# Altium PCB AP.PcbDoc (part 3 of 3)
Units mm, origin at the board's own origin, x right, y up, seen from the top; angles counter-clockwise.
Board outline 75.1 x 75.1 mm, 2 copper layers (Top Layer, Bottom Layer); 135 components, 138 nets, 746 pads, 286 vias.
Unrouted connection lines stored in the file: 9.
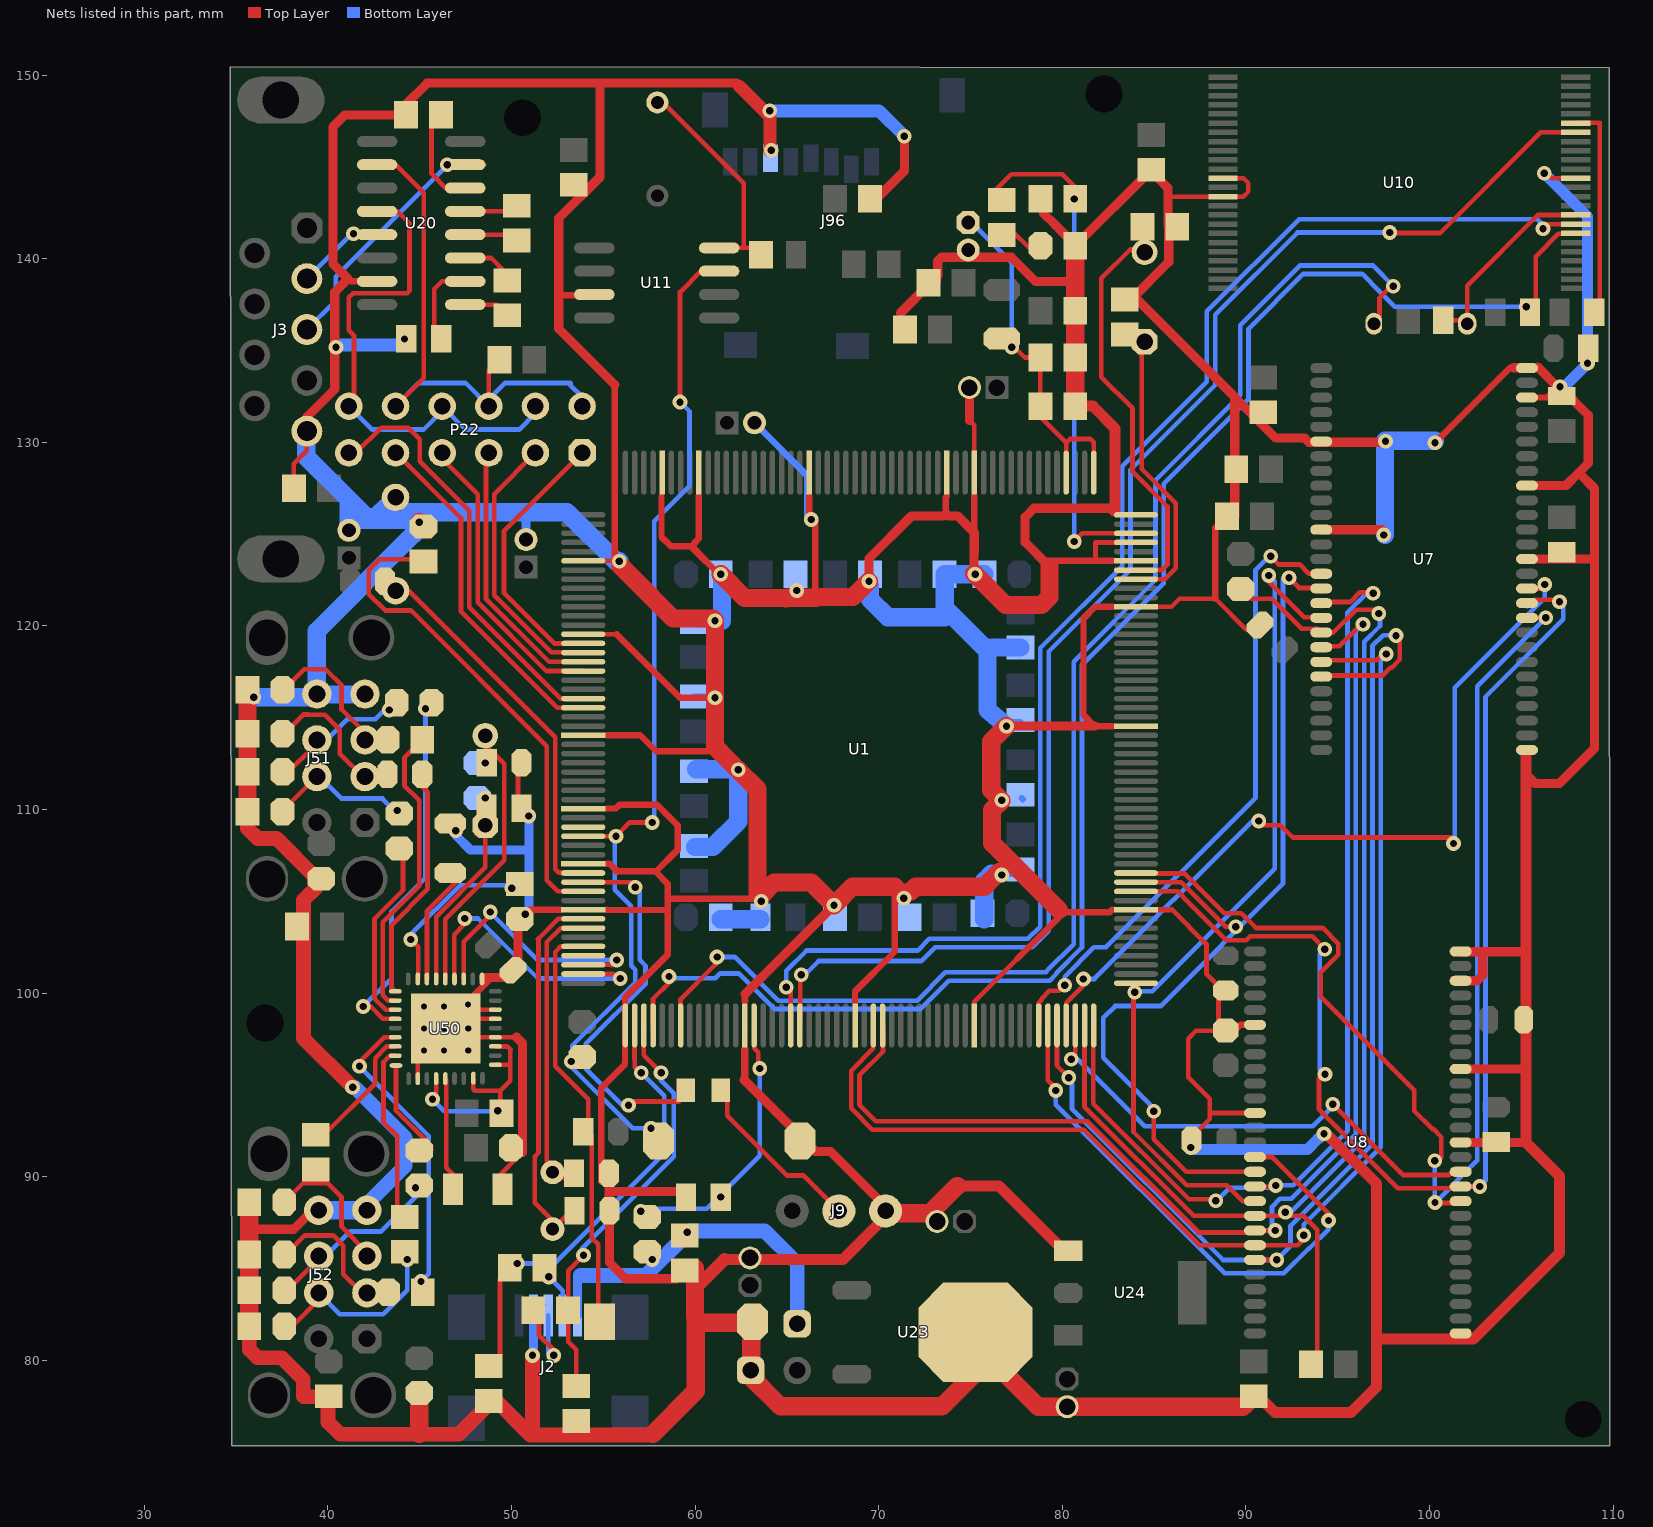
[diagram p3: the nets of this part, all layers, seen from the top]

## Via types
v1: diameter 0.8, hole 0.4, Top Layer to Bottom Layer, 277 vias
v2: diameter 0.66, hole 0.33, Top Layer to Bottom Layer, tented top, 9 vias

## Nets (pads, with @x,y where several pads share a name; then routed paths per layer and width w, separated by ;. In a path a pad name is that pad's centre, name@x,y a point inside that pad or via, vN(x,y) a via of type N, cw(c..) or ccw(c..) an arc to the next point about the centre after c; other vN are vias at no path point) (continued)
GND: C1.1 C2.1 C3.1 C4.1 C5.1 C6.1 C7.1 C8.1 C9.1 C10.1 C11.1 C12.1 C13.1 C14.1 C15.1 C16.1 C17.1 C18.1 C19.1 C20.1 C21.2 C22.2 C23.2 C24.2 C25.1 C26.2 C27.2 C28.2 C29.2 C33.2 C34.2 C35.2 C38.1 C39.2 C40.2 C41.2 C42.1 C45.2 C46.2 C47.2 C51.1 C52.1 C53.1 C54.1 C55.1 C56.1 C57.1 C58.1 C60.2 C61.2 C62.2 C63.2 C64.2 C66.2 C70.1 C80.2 C81.2 C82.2 C83.2 C88.2 C89.2 C90.2 C91.2 C92.2 C93.2 C98.2 C99.2 C120.2 C121.1 J2.4 J3.5 J7.2 J9.1 J51.4 J51.8 J52.4 J52.8 J96.6 P20.1 R13.2 R16.1 R88.2 R89.1 R90.2 R91.2 R92.2 R93.2 R94.1 R95.1 R100.2 S1.1 S2.2 U1.6 U1.14 U1.25 U1.33 U1.39 U1.44 U1.53 U1.66 U1.78 U1.91 U1.113 U1.133 U1.146 U1.151 U1.153 U1.156 U1.170 U1.173 U1.188 U1.200 U1.204 U7.6 U7.12 U7.28 U7.41 U7.46 U7.52 U7.54 U8.6 U8.12 U8.28 U8.41 U8.46 U8.52 U8.54 U10.13 U10.36 U10.38 U11.7 U20.15 U23.4 U24.1 U50.11 U50.22 U50.24 U50.25 U50.28 U50.33@46.425,98.075 | length 895.8
  Top Layer w0.2: U1.33@53.9,110.057 U1.33@53.911,110.046
  Top Layer w0.25: C70.1@38.166,127.508 38.15,127.524 38.15,128.825 38.86,129.535 J3.5@38.86,130.604 38.86,131.112 38.872,131.124 J3.5@38.872,131.397 ; U50.33@48.039,99.1 U50.25@49.125,99.1 ; U50.33@48.064,98.6 U50.24@49.125,98.6 ; U50.33@48.089,97.6 U50.22@49.125,97.6 ; C90.2@50.175,109.692 C90.2@50.392,109.909 ; U1.14@53.911,119.546 55.726,119.546 ; U1.6@53.911,123.546 55.663,123.546 v1@55.686,123.546 ; 74.942,131.191 75.211,130.922 U1.170@75.211,128.346 ; U1.91@75.211,98.246 75.211,99.538 77.573,101.9 ; 81.809,123.562 81.809,124.546 U1.153@84.011,124.546 ; C22.2@83.4,137.825 C22.2@83.798,137.825 ; U1.133@84.011,114.546 U1.133@84.017,114.552 ; U1.146@84.011,121.046 85.946,121.046 86.392,121.492 88.333,121.492 90,119.825 90.541,119.825 C66.2@90.768,120.052 ; C51.1@85.229,144.89 85.278,144.89 C51.1@85.278,144.322 ; 85.754,143.381 U10.38@88.753,143.381 U10.38@88.728,143.406 ; 85.98,104.546 85.991,104.546 ; C57.1@86.934,91.44 86.934,92.059 88.025,93.15 88.025,94.261 86.854,95.431 86.854,97.53 87.279,97.955 88.479,97.955 88.504,97.93 88.655,97.93 C58.1@88.675,97.95 ; 88.025,93.476 U8.12@90.496,93.476 ; C52.1@88.333,125.351 C52.1@88.966,125.984 ; U10.38@88.753,143.369 89.844,143.369 90.137,143.662 90.137,144.109 89.866,144.381 U10.36@88.753,144.381 ; v1@106.313,144.712 106.639,144.386 U10.13@107.953,144.386
  Top Layer w0.254: U50.11@44.9,95.35 U50.33@44.9,96.743 ; U50.33@46.425,98.075 U50.33@46.61,98.075 ; C98.2@49.1,89.825 C120.2@50.6,91.325 ; U50.22@49.125,97.6 50.275,97.6 ; C121.1@49.8,101.05 49.611,101.239 49.611,101.261 C121.1@50.088,101.261 ; C90.2@50.361,110.426 C89.2@50.361,112.458 ; 85.98,104.546 87.85,102.676 87.85,101.054 88.504,100.4 C58.1@88.504,97.93
  Top Layer w0.275: U1.113@84.011,104.546 85.979,104.546
  Top Layer w0.35: C83.2@38.432,103.632 C83.2@38.674,103.632 ; 41.275,138.768 U20.15@42.685,138.768 ; v1(44.175,135.625) 44.264,135.625 C38.1@44.275,135.636 ; U50.33@47.925,99.85 48.888,100.813 ; R100.2@50.067,104.008 R100.2@50.35,103.725 ; R100.2@50.442,104.037 50.953,104.548 52.65,104.548 ; C90.2@50.543,110.06 v1(50.95,109.653) ; 52.578,138.007 54.47,138.007 U11.7@54.512,138.049 ; C24.2@54.889,89.725 54.889,94.839 56.186,96.136 56.186,99.767 ; 55.203,104.546 55.216,104.533 58.503,104.533 ; 55.203,107.046 55.352,107.043 55.775,106.6 ; 55.213,114.046 57.011,114.046 57.888,113.169 61.341,113.169 ; 55.215,110.057 55.689,110.057 55.886,110.254 57.937,110.254 59.049,109.142 59.049,107.798 57.858,106.607 ; 55.626,133.139 v1@55.626,123.606 ; 55.726,119.546 59.182,116.09 v1(61.087,116.09) ; 55.75,106.688 55.788,106.65 57.815,106.65 57.858,106.607 ; v1(55.878,123.531) 55.701,123.531 v1@55.626,123.606 ; v1@55.953,123.279 55.686,123.546 v1@55.626,123.606 ; 56.186,99.453 56.186,99.767 ; 56.503,122.706 56.503,122.954 56.202,123.255 55.953,123.255 55.663,123.546 55.626,123.583 v1@55.626,123.606 ; 58.172,127.036 58.172,124.847 58.669,124.35 59.755,124.35 59.944,124.161 ; 59.997,82.393 59.997,83.897 ; 60.04,82.057 60.045,82.062 ; 60.192,125.964 60.192,124.742 59.944,124.494 59.944,124.226 ; 60.211,125.983 60.211,127.054 ; v1@61.343,122.762 v1@61.284,122.821 ; v1@61.342,122.763 v1@61.287,122.821 ; v1@61.343,122.762 61.443,122.662 61.344,122.765 v1@61.291,122.821 ; v1(61.402,122.821) v1@61.291,122.821 ; S1.1@62.653,81.881 S1.1@62.702,81.832 ; 62.711,99.563 62.738,99.59 ; 62.713,99.615 62.713,100.011 ; S1.1@62.989,81.545 S1.1@63.059,81.475 ; P20.1@63.059,79.799 63.21,79.599 P20.1@63.294,79.488 ; v1@63.375,105.092 v1@63.426,105.143 ; v1@63.479,105.196 v1@63.426,105.143 ; v1@63.6,105.143 v1@63.426,105.143 ; v1(65.532,121.932) 65.405,121.805 64.975,121.5 65.532,121.507 66.579,121.532 ; 66.211,127.054 66.211,126.079 66.22,126.07 66.548,125.742 66.548,121.551 ; 68.711,99.538 68.711,100.092 70.878,102.259 70.878,105.168 70.878,105.803 ; v1@69.469,122.313 v1(69.469,122.44) ; C40.2@69.53,143.256 C40.2@69.881,143.256 ; J9.1@70.25,88.142 J9.1@70.25,88.025 ; J9.1@70.25,88.266 J9.1@70.25,88.025 ; J9.1@70.491,88.025 J9.1@70.25,88.025 ; v1(71.374,105.168) 71.755,105.549 ; 71.374,105.803 70.878,105.803 ; 71.755,105.803 70.878,105.803 ; C27.2@72.767,138.626 73.218,139.077 C27.2@73.218,138.684 ; 73.66,126.117 73.66,127.003 73.711,127.054 ; 75.211,124.853 75.211,125.08 75.202,125.089 75.211,127.054 ; U23.4@75.654,83.709 76.516,83.709 76.527,83.698 76.53,83.696 U23.4@76.98,83.245 ; v1@76.554,106.592 v1@76.708,106.746 ; v1@76.683,110.502 76.683,110.477 v1(76.708,110.502) ; v1(76.708,106.438) v1@76.708,106.746 ; v1@76.862,106.592 v1@76.708,106.746 ; 77.573,101.9 79.817,104.144 79.817,104.533 79.931,104.419 82.573,104.419 82.687,104.533 ; 78.994,142.456 78.994,143.256 C28.2@78.994,143.775 ; 79.031,123.546 82.719,123.546 ; 79.609,141.841 79.611,141.841 ; U24.1@79.807,85.678 U24.1@79.807,85.966 ; 79.831,141.619 79.831,141.621 ; C29.2@80.6,140.85 80.706,140.85 C29.2@80.825,140.85 ; C29.2@80.765,140.657 C29.2@80.765,140.754 ; 82.522,126.405 82.804,126.123 ; 82.706,104.533 82.719,104.546 ; 82.719,114.546 81.768,114.546 81.153,115.161 81.153,120.408 81.791,121.046 82.719,121.046 ; C22.2@83.875,137.983 C22.2@83.875,137.995 ; C51.1@84.796,144.938 C51.1@84.836,144.956 ; C51.1@84.841,144.831 C51.1@85.202,144.956 ; C51.1@85.061,144.715 C51.1@85.202,144.956 ; C51.1@85.229,144.89 C51.1@85.202,144.956 ; 87.02,134.838 89.393,132.464 ; 88.333,121.492 C52.1@88.333,125.351 ; C58.1@89.24,97.81 89.706,98.276 U8.6@90.496,98.276 ; C52.1@89.393,125.933 C52.1@89.408,125.918 ; v1(100.3,129.975) 104.382,134.057 104.582,134.057 ; U8.52@101.252,100.676 U8.52@101.696,100.676 ; U8.54@101.431,102.276 U8.54@101.696,102.276 ; U8.28@101.696,81.476 U8.28@102.024,81.476 ; U7.46@105.302,127.642 U7.46@105.309,127.649 ; U7.52@105.302,132.442 106.417,132.442 v1@107.005,133.03 ; U7.54@105.474,134.1 U7.54@105.887,134.1 ; v1@106.957,133.03 v1@107.005,133.03 ; v1@107.053,133.078 v1@107.005,133.03 ; v1(107.101,133.03) v1@107.005,133.03 ; 56.186,99.767 58.503,102.084 58.503,104.533 ; 57.858,106.607 58.503,105.962 58.503,105.143 ; 58.503,104.533 58.503,105.143 ; 58.503,105.143 v1@63.426,105.143 ; 59.944,124.161 v1@61.284,122.821 ; 59.944,124.161 59.944,124.226 ; 59.944,124.226 v1@61.287,122.821 ; 59.944,124.226 59.825,124.35 59.944,124.226 ; 59.944,124.226 v1@61.291,122.821 ; v1@61.284,122.821 v1@61.287,122.821 ; v1@61.287,122.821 v1@61.291,122.821
  Top Layer w0.4: 62.7,95.3 62.7,96.925
  Top Layer w0.5: 35.996,87.15 38.15,87.15 39.18,88.18 J52.8@39.506,88.18 ; J3.5@38.872,131.397 40.375,132.9 40.375,138.175 41.1,138.9 40.275,139.725 40.275,147.175 40.928,147.828 C42.1@44.262,147.828 ; C42.1@44.262,148.414 45.409,149.561 62.239,149.561 62.414,149.386 ; U50.28@48.5,100.85 50.05,100.85 50.35,101.15 R100.2@50.35,103.725 ; 50.275,97.6 50.6,97.275 C120.2@50.6,91.85 ; C120.2@50.6,91.325 50.6,92.15 ; 54.825,149.386 54.825,144.45 52.578,142.203 52.578,138.007 52.578,136.187 55.626,133.139 ; C23.2@55.306,88.186 55.306,89.204 ; C24.2@55.306,90.191 55.306,89.204 ; C23.2@55.333,88.159 55.333,85.342 56.225,84.45 58.984,84.45 C33.2@59.436,84.902 ; R13.2@59.198,89.204 55.306,89.204 ; 62.675,95.275 66.562,91.388 67.362,91.388 J9.1@70.491,88.259 ; 62.738,99.961 v1(67.564,104.787) ; v1(69.469,122.44) 69.469,123.669 71.79,125.99 73.527,125.99 ; C40.2@69.881,143.256 71.4,144.775 v1(71.4,146.675) ; 71.186,137.045 C27.2@72.767,138.626 ; C27.2@73.218,139.077 73.218,139.875 73.418,140.075 77.225,140.075 78.55,138.75 80.706,138.75 ; 73.66,126.117 73.787,125.99 74.301,125.99 75.202,125.089 v1@75.191,122.821 ; 74.942,131.191 C39.2@74.942,132.981 ; v1(76.962,114.546) 81.768,114.546 ; 78.994,142.456 79.609,141.841 ; 79.3,123.225 77.975,124.55 77.975,125.925 78.455,126.405 82.522,126.405 ; 79.611,141.841 79.831,141.621 ; 79.831,141.619 C29.2@80.6,140.85 ; C29.2@80.765,140.754 C51.1@84.841,144.831 ; C22.2@83.798,137.825 85.8,139.827 C21.2@85.8,141.857 ; C22.2@83.875,137.983 87.02,134.838 91.626,130.231 92.502,130.231 93.207,130.231 93.432,130.006 97.556,130.006 v1(97.6,130.05) ; C51.1@85.278,144.322 85.754,143.846 85.754,143.381 C21.2@85.754,141.764 ; C52.1@89.393,125.933 89.393,132.464 ; U7.12@94.102,125.242 97.414,125.242 97.602,125.055 97.602,125.052 v1(97.5,124.95) ; U8.41@101.696,91.876 105.251,91.876 ; U8.46@101.696,95.876 105.109,95.876 ; U8.52@101.696,100.676 102.601,100.676 102.9,100.975 102.9,102.208 ; U8.54@101.696,102.29 101.73,102.256 105.251,102.256 ; 104.582,134.057 U7.54@105.043,134.057 ; 105.251,111.925 105.751,111.425 107.075,111.425 108.98,113.33 108.98,127.482 108.122,128.341 ; U7.41@105.302,123.642 108.98,123.642 ; U7.46@105.309,127.649 107.43,127.649 108.122,128.341 ; U7.54@105.887,134.1 v1@106.957,133.03 ; v1(107.101,133.03) 108.647,131.484 108.647,128.866 108.122,128.341
  Top Layer w0.6: 61.6,85.5 68.05,85.5 70.25,87.7 J9.1@70.25,88.025 ; 74.275,89.5 75.725,89.5 76.55,89.5 U24.1@80.193,85.857 ; C19.1@80.706,131.965 81.661,131.965 82.875,130.751 82.875,126.35 ; C53.1@91.05,77.7 91.575,77.175 95.726,77.175 97.1,78.549 97.1,81.164 ; v1@94.312,92.412 97.1,89.625 97.1,81.164 ; U7.28@105.251,113.191 105.251,102.256 105.251,91.876 107.075,90.051 107.075,85.85 102.389,81.164 97.1,81.164
  Top Layer w0.7: 59.997,83.897 61.6,85.5 ; 62.414,149.386 64.075,147.725 64.075,145.925 v1@64.05,145.9
  Top Layer w0.8: R90.2@35.626,109.887 35.626,108.972 36.173,108.425 37.21,108.425 C82.2@39.355,106.28 ; R95.1@35.726,81.874 35.726,80.599 36.175,80.15 37.482,80.15 38.325,79.307 38.666,78.966 38.666,78.059 38.7,78.025 39.814,78.025 40.016,77.823 40.016,76.634 40.675,75.975 47.125,75.975 C34.2@48.7,77.55 ; C82.2@39.349,105.73 38.674,105.055 38.674,103.632 38.674,97.551 v1(41.35,94.875) ; C34.2@48.7,78.025 48.95,78.025 51.039,75.936 ; v1(51.15,80.275) 51.15,75.936 57.614,75.936
  Top Layer w1: R90.2@35.626,109.887 R91.2@35.626,112.052 R88.2@35.626,115.824 ; R95.1@35.726,81.874 35.726,85.696 35.726,86.88 R92.2@35.726,88.236 ; v1(44.975,125.65) 44.972,125.65 R16.1@45.212,125.41 ; 44.979,76.004 C81.2@44.979,78.223 ; R16.1@45.202,125.605 R16.1@45.225,125.605 ; v1@55.953,123.279 55.953,123.255 56.503,122.706 58.801,120.408 v1@60.96,120.408 ; 57.7,76 60.04,78.34 60.04,82.057 ; C33.2@60,85.025 60,82.376 60.04,82.336 60.04,82.057 ; v1(61.087,120.281) v1(61.087,116.09) 61.087,113.423 61.341,113.169 v1(62.348,112.162) 63.4,111.11 63.4,105.45 63.636,105.352 64.308,106.025 66.326,106.025 v1(67.564,104.787) 68.58,105.803 70.878,105.803 ; v1(61.402,122.821) 62.698,121.525 64.975,121.525 ; S1.1@62.376,82.057 60.04,82.057 ; P20.1@62.872,79.278 64.65,77.5 73.45,77.5 U23.4@75.273,79.323 ; P20.1@63.059,79.456 63.059,79.799 S1.1@63.059,81.475 ; 64.975,121.5 65.007,121.532 66.579,121.532 ; 66.886,121.575 68.604,121.575 v1(69.469,122.44) ; J9.1@70.491,88.025 72.8,88.025 74.275,89.5 ; 71.755,105.549 72.009,105.803 75.765,105.803 v1@76.554,106.592 ; v1@75.21,122.84 76.906,121.144 78.867,121.144 79.3,121.577 79.3,123.225 ; U23.4@75.273,81.538 U23.4@75.273,82.439 ; U23.4@76.516,83.709 U23.4@76.516,83.259 ; v1@76.683,110.477 76.175,109.969 76.175,108.175 79.817,104.533 ; v1@76.683,110.502 76.125,111.06 76.125,113.709 v1(76.962,114.546) ; U23.4@76.825,79.35 78.7,77.475 89.826,77.475 C53.1@90.424,78.073 ; C19.1@80.706,131.965 C20.1@80.706,134.62 C25.1@80.706,137.16 80.706,138.75 C29.2@80.706,140.716 ; U23.4@76.516,83.259 76.755,83.02 U23.4@76.516,83.259
  Bottom Layer w0.25: J3.5@38.825,130.604 J3.5@38.825,130.675
  Bottom Layer w0.35: v1(40.45,135.175) v1@40.575,135.3 ; J52.4@42.126,88.18 J52.4@42.126,88.501 ; 43.85,135.3 v1(44.175,135.625) ; v1(50.75,104.3) v1@50.95,104.5 ; C5.1@59.944,108.023 C5.1@60.005,107.962 ; C14.1@59.944,112.087 C14.1@60.061,112.204 ; C3.1@59.944,116.151 v1@61.087,116.151 ; C2.1@59.944,120.215 60.066,120.093 61.087,120.093 61.468,120.093 v1@61.468,120.281 ; v1(61.402,122.821) C18.1@61.468,122.755 ; v1@62.23,112.204 62.31,112.124 v1@62.357,112.077 ; C92.2@63.234,131.064 66.1,128.198 66.1,126.025 v1(66.325,125.8) ; C4.1@69.53,122.186 C4.1@69.53,122.821 ; v1(75.25,122.821) 75.25,122.8 75.493,122.556 75.55,122.5 75.663,122.5 C8.1@75.758,122.405 ; v1@76.7,114.759 76.962,114.759 C16.1@77.724,114.759 ; v1@76.708,106.504 C11.1@77.851,106.504 ; C12.1@77.79,110.629 C12.1@77.851,110.568 ; v1(107.101,133.03) 107.101,132.935 107.11,132.925 107.225,132.925 v1@107.425,133.125
  Bottom Layer w0.5: v1(46.975,108.85) 46.975,108.6 47.775,107.8 50.95,107.8 ; C93.2@50.8,124.702 50.8,126.041 ; v1@50.95,104.5 50.95,107.2 v1(50.95,109.653) ; v1@51.204,80.329 J2.4@51.204,82.451
  Bottom Layer w0.6: J7.2@43.325,126.637 J7.2@43.688,127 ; v1(87,91.6) 87.1,91.5 93.359,91.5 93.939,92.079 93.98,92.079 v1(94.25,92.35) ; v1(106.25,144.65) 108.6,142.3 v1(108.6,134.3) ; v1@107.425,133.125 v1(108.6,134.3) ; 108.6,136.525 v1(108.6,134.3)
  Bottom Layer w0.7: v1@40.45,135.3 43.85,135.3 ; v1(64.075,148.05) 70.025,148.05 v1(71.4,146.675)
  Bottom Layer w0.8: v1(41.35,94.875) 41.475,94.875 44.225,92.125 44.225,90.6 J52.4@42.126,88.501
  Bottom Layer w1: v1(35.975,116.125) 39.406,116.125 39.406,119.728 44.704,125.026 44.704,125.984 ; J3.5@38.825,130.675 38.825,130.604 38.825,129.208 41.148,126.885 ; J51.8@39.406,116.268 J51.4@42.026,116.268 ; J52.8@39.506,88.18 J52.4@41.618,88.18 ; C91.2@41.148,125.21 41.148,126.885 ; 41.866,125.791 44.209,125.791 ; J7.2@43.325,126.637 42.613,125.925 42.108,125.925 41.148,126.885 ; 44.494,125.706 44.494,126.194 53.015,126.194 55.678,123.531 v1(55.878,123.531) ; C5.1@60.005,107.962 60.962,107.962 62.357,109.357 v1@62.357,112.077 ; C14.1@60.061,112.204 v1@62.23,112.204 ; C6.1@61.402,104.025 C7.1@63.566,104.025 ; v1@61.468,120.281 C18.1@61.468,122.755 ; 69.53,121.445 70.496,120.479 73.554,120.479 ; 69.53,121.45 C4.1@69.53,122.186 ; 73.594,120.479 C17.1@73.594,122.821 v1(75.25,122.821) C8.1@75.758,122.821 ; 73.662,120.912 75.752,118.823 ; C10.1@75.758,104.025 75.758,106.118 76.144,106.504 ; 75.925,118.825 75.925,115.434 v1@76.7,114.759 ; 76.205,118.823 C13.1@77.724,118.823 ; v1@97.575,124.95 v1@97.575,130.025 ; v1(97.6,130.05) 97.589,130.076 v1@100.3,130.076
  other v1: 63.6,105 64.15,145.9
NANDOE: U1.71 U10.8 | length 77.8
  Top Layer w0.254: v1@64.988,100.337 65.211,100.114 U1.71@65.211,98.246 ; v1(106.175,141.625) 106.431,141.881 U10.8@107.953,141.881
  Bottom Layer w0.254: v1(64.975,100.325) 64.975,101.23 66.069,102.324 72.124,102.324 72.757,102.957 78.128,102.957 78.801,103.631 78.801,118.798 83.259,123.256 83.259,128.695 87.874,133.31 87.874,137.132 92.894,142.152 105.873,142.152 106.175,141.85 v1(106.175,141.625)
NANDWE: U1.72 U10.18 | length 78
  Top Layer w0.254: U1.72@65.711,98.246 65.725,98.26 65.725,100.905 v1@65.82,101 ; v1(97.825,141.425) 97.85,141.4 100.575,141.4 106.056,146.881 U10.18@107.953,146.881
  Bottom Layer w0.254: v1@66.003,101.183 66.006,101.18 66.152,101.18 66.724,101.752 68.191,101.752 68.193,101.75 72.317,101.75 73.07,102.503 78.353,102.503 79.255,103.405 79.255,118.61 83.713,123.068 83.713,128.506 88.328,133.121 88.328,136.944 92.809,141.425 v1(97.825,141.425)
  other v1: 65.778,101.005
NetC19_2: C19.2 C20.2 C88.1 L1.1 U1.157 U1.160 | length 21.7
  Top Layer w0.254: L1.1@76.708,135.644 76.931,135.644 77.955,134.62 C20.2@78.806,134.62 ; L1.1@77.216,136.037 L1.1@77.216,135.759 ; v1(77.25,135.175) 77.216,135.209 77.216,135.644 L1.1@77.216,135.759 ; L1.1@77.525,135.45 L1.1@77.216,135.759 ; C20.2@78.58,134.394 78.806,134.169 C19.2@78.806,131.965 78.806,131.394 80.211,129.989 ; U1.160@80.211,128.346 80.211,129.989 ; U1.157@81.711,128.346 81.711,130.01 81.543,130.178 80.4,130.178 80.211,129.989
  Bottom Layer w0.254: C88.1@74.964,142.061 77.25,139.775 v1(77.25,135.175)
NetC21_1: C21.1 U1.150 Y1.2 | length 21.8
  Top Layer w0.254: U1.150@84.011,123.046 85.442,123.046 85.725,123.329 85.725,126.504 83.827,128.402 83.827,131.848 82.125,133.55 82.125,138.925 83.701,140.501 Y1.2@84.328,140.501
NetC22_1: C22.1 U1.149 Y1.1 | length 15.7
  Top Layer w0.254: U1.149@84.011,122.546 85.584,122.546 86.179,123.141 86.179,126.692 84.325,128.546 Y1.1@84.325,135.621
NetC23_1: C23.1 U1.45 Y2.2 | length 20.4
  Top Layer w0.254: 51.449,102.951 52.544,104.046 U1.45@53.911,104.046 ; 51.465,102.951 51.476,102.94 51.476,91.317 51.264,91.105 51.264,88.577 Y2.2@52.241,87.6 ; Y2.2@52.241,87.15 53.25,88.159 C23.1@53.433,88.159
NetC24_1: C24.1 U1.46 Y2.1 | length 16.2
  Top Layer w0.254: C24.1@53.406,89.701 53.099,89.701 51.93,90.87 51.93,102.79 52.686,103.546 U1.46@53.911,103.546
NetC28_1: C28.1 R3.1 U1.154 | length 28
  Top Layer w0.254: R3.1@76.221,143.604 76.258,143.641 77.217,144.6 79.995,144.6 80.645,143.95 80.645,143.256 v1(80.645,143.25) ; v1(80.645,124.599) 81.092,125.046 U1.154@84.011,125.046
  Bottom Layer w0.254: v1(80.645,124.599) v1(80.645,143.25)
NetC29_1: C29.1 R3.2 | length 1.4
  Top Layer w0.254: R3.2@77.258,141.517 C29.1@78.275,140.5
NetC34_1: C34.1 R10.1 U1.54 | length 24.7
  Top Layer w0.254: C34.1@49.25,80.172 C34.1@48.768,79.69 49.375,80.297 49.375,84.476 R10.1@49.96,85.061 ; U1.54@56.711,98.246 56.7,98.235 56.7,96.382 56.713,96.369 56.713,95.961 56.999,95.675 v1(57.075,95.675)
  Bottom Layer w0.254: v1(50.325,85.277) 52.327,85.277 58.327,91.277 58.327,94.423 v1(57.075,95.675)
NetC35_1: C35.1 R11.1 U1.55 | length 23.3
  Top Layer w0.254: C35.1@53.528,78.599 53.528,80.572 53.087,81.013 R11.1@53.087,82.729 53.087,84.887 v1(53.925,85.725) ; C35.1@53.975,78.599 C35.1@54.141,78.765 ; U1.55@57.234,98.223 U1.55@57.211,98.246 57.211,96.614 v1(58.15,95.675)
  Bottom Layer w0.254: v1(53.925,85.725) 53.875,85.725 53.834,85.766 53.834,86.091 58.834,91.09 58.834,94.558 58.15,95.242 v1(58.15,95.675)
NetC36_1: C36.1 U20.5 | length 3
  Top Layer w0.2: U20.5@47.485,142.578 U20.5@47.513,142.55
  Top Layer w0.254: U20.5@47.485,142.578 49.989,142.578 C36.1@50.292,142.881
NetC36_2: C36.2 U20.4 | length 2.5
  Top Layer w0.254: U20.4@47.485,141.308 C36.2@49.965,141.308
NetC37_1: C37.1 U20.3 | length 2.3
  Top Layer w0.254: U20.3@47.485,140.038 48.895,140.038 C37.1@49.53,139.403
NetC37_2: C37.2 U20.1 | length 2.5
  Top Layer w0.254: U20.1@47.485,137.498 49.203,137.498 C37.2@49.784,136.917
NetC38_2: C38.2 U20.2 | length 4.7
  Top Layer w0.254: C38.2@46.175,135.636 45.8,136.011 45.8,138.35 46.218,138.768 U20.2@47.485,138.768
NetC42_2: C42.2 U20.6 | length 5.6
  Top Layer w0.254: C42.2@46.162,147.828 45.65,147.316 45.65,144.625 46.427,143.848 U20.6@47.485,143.848
NetC89_1: C89.1 R105.2 U50.32 Y3.2 | length 15.2
  Top Layer w0.254: U50.32@46.4,100.775 46.4,104.03 49.604,107.234 49.604,112.489 Y3.2@48.069,114.024
  other v1: 48.577,112.534
NetC90_1: C90.1 R105.1 U50.33@45.9,100.775 Y3.1 | length 10.2
  Top Layer w0.254: U50.33@45.9,100.775 45.9,104.172 48.577,106.849 Y3.1@48.577,109.144 Y3.1@48.1,108.667
  other v1: 48.577,110.634
  other v2: 45.25,96.875 46.316,96.868 47.65,96.875 45.25,98.075 46.316,98.068 47.65,98.075 45.25,99.275 46.316,99.268 47.641,99.393
NetC98_1: C98.1 U50.14 | length 5.6
  Top Layer w0.254: U50.14@46.4,95.35 46.446,95.304 46.446,90.504 C98.1@47,89.95
NetC99_1: C99.1 U50.34 | length 6.1
  Top Layer w0.254: U50.34@45.4,100.775 45.4,104.475 C99.1@47.129,106.204
NetJ2_2: J2.2 R10.2 | length 2.4
  Bottom Layer w0.254: v1@52.038,84.562 52.804,83.796 J2.2@52.804,82.451
  other v1: 52.025,84.55
NetJ2_3: J2.3 R11.2 | length 5.6
  Top Layer w0.254: R11.2@51.725,83.025 51.5,82.8 51.5,81.375 52.3,80.575 v1(52.3,80.275)
  Bottom Layer w0.254: J2.3@52,82.447 52,80.375 52.1,80.275 v1(52.3,80.275)
NetJ3_2: J3.2 U20.13 | length 4.9
  Top Layer w0.254: v1@41.367,141.308 U20.13@42.685,141.308
  Bottom Layer w0.254: J3.2@38.86,138.914 38.864,138.914 41.302,141.352 v1(41.4,141.352)
NetJ3_3: J3.3 U20.7 | length 15.2
  Top Layer w0.254: v1(46.5,145.109) 48.506,145.109 48.506,145.118 U20.7@47.485,145.118
  Bottom Layer w0.254: J3.3@38.86,136.144 40.425,137.709 40.425,139.016 v1@46.509,145.1
NetJ7_1: J7.1 R17.2 U1.40 | length 21.9
  Top Layer w0.254: R17.2@43.35,121.9 J7.1@44.425,121.9 ; J7.1@43.688,121.92 44.405,121.92 52.384,113.941 52.384,106.761 52.576,106.569 52.686,106.569 52.686,106.546 U1.40@53.911,106.546
NetJ9_2: J9.2 R1.1 | length 9.5
  Top Layer w0.254: R1.1@61.402,94.488 61.75,94.14 61.75,93.325 65,90.075 65.901,90.075 J9.2@67.834,88.142
NetJ20_2: J20.2 R24.2 U11.4 | length 11.9
  Top Layer w0.254: J20.2@57.946,148.511 58.239,148.511 62.65,144.1 62.65,140.589 ; U11.4@61.312,140.589 62.65,140.589 ; R24.2@63.212,140.589 62.65,140.589
NetJ21_1: J21.1 U1.59 | length 76.3
  Top Layer w0.254: U1.59@59.211,98.246 59.211,99.661 61.112,101.562 61.112,101.917 61.169,101.975 v1(61.2,101.975) ; J21.1@96.97,136.46 97.275,136.765 97.275,137.875 97.9,138.5 v1(98.025,138.5)
  Bottom Layer w0.254: v1(61.2,101.975) 62.15,101.975 64.527,99.598 72.091,99.598 73.634,101.141 79.124,101.141 ; 79.217,101.276 80.617,102.676 80.617,118.046 85.075,122.504 85.075,127.942 89.69,132.557 89.69,136.379 92.936,139.625 96.923,139.625 v1@98.036,138.511
NetJ21_2: J21.2 R20.1 U10.9 | length 10.9
  Top Layer w0.254: R20.1@100.518,136.652 J21.2@101.858,136.652 ; J21.2@102.05,136.46 102.05,138.528 105.903,142.381 U10.9@107.953,142.381
NetJ51_2: J51.2 R81.2 R89.2 | length 7.2
  Top Layer w0.254: R89.2@37.526,114.026 38.675,115.175 38.93,115.175 38.939,115.166 39.834,115.166 40.65,114.35 40.65,113.05 J51.2@42.026,111.674
NetJ51_3: J51.3 R80.2 R88.1 | length 7.1
  Top Layer w0.254: R88.1@37.868,116.793 38.725,117.65 39.875,117.65 40.75,116.775 40.75,115.45 42.026,114.174 J51.3@42.026,113.793
NetJ51_6: J51.6 R83.2 R90.1 | length 7.6
  Top Layer w0.254: R90.1@37.451,109.863 J51.6@39.331,111.743
  Bottom Layer w0.254: J51.6@39.406,111.268 40.082,111.268 40.75,110.6 42.975,110.6 43.625,109.95 v1(43.775,109.95)
NetJ51_7: J51.7 R82.2 R91.1 | length 8
  Top Layer w0.254: R91.1@37.526,111.726 J51.7@39.5,113.7
  Bottom Layer w0.254: J51.7@39.406,113.268 41.058,114.92 42.595,114.92 43.351,115.676 43.35,115.675 v1(43.35,115.425)
NetJ52_2: J52.2 R84.2 R93.1 | length 7.1
  Top Layer w0.254: R93.1@37.626,85.696 38.737,86.807 40.293,86.807 40.85,86.25 40.85,84.7 J52.2@41.998,83.552
NetJ52_3: J52.3 R85.2 R92.1 | length 8
  Top Layer w0.254: R92.1@37.626,88.236 37.626,88.626 38.65,89.65 40,89.65 40.75,88.9 40.75,87.275 42.126,85.899 J52.3@42.126,85.68
NetJ52_6: J52.6 R86.2 R95.2 | length 10.5
  Top Layer w0.254: R95.2@37.626,81.426 39.506,83.306 J52.6@39.506,83.68
  Bottom Layer w0.254: J52.6@39.506,83.68 40.661,82.525 43.025,82.525 44.325,83.825 v1(44.325,85.5)
NetJ52_7: J52.7 R87.2 R94.2 | length 9.8
  Top Layer w0.254: R94.2@37.626,83.664 39.506,85.544 J52.7@39.506,85.68
  Bottom Layer w0.254: J52.7@39.506,85.68 39.872,85.68 41.217,87.025 42.9,87.025 44.872,88.997 v1@44.872,89.303
  other v1: 44.775,89.4
NetP22_1: P22.1 U1.15 | length 14.9
  Top Layer w0.254: P22.1@53.848,129.425 49.6,125.177 49.6,121.775 52.329,119.046 U1.15@53.911,119.046
NetP22_2: P22.2 P22.6 P22.10 R14.1 U20.10 | length 31.1
  Top Layer w0.254: U20.10@42.685,145.118 43.707,145.118 45.225,143.6 45.225,133.502 P22.10@43.688,131.965 ; P22.6@48.768,131.965 48.768,133.931 R14.1@49.342,134.505
  Bottom Layer w0.254: P22.10@43.688,131.965 44.958,133.235 47.498,133.235 P22.6@48.768,131.965 48.768,132.346 49.657,133.235 53.213,133.235 53.213,133.108 53.848,132.473 P22.2@53.848,131.965
NetP22_3: P22.3 U1.16 | length 14.8
  Top Layer w0.254: P22.3@51.308,129.425 49.066,127.183 49.066,121.667 52.164,118.569 53.888,118.569 U1.16@53.911,118.546
NetP22_4: P22.4 P22.8 P22.12 U20.12 | length 28
  Top Layer w0.254: P22.12@41.148,131.965 41.425,132.242 41.425,135.825 41.148,136.102 41.148,137.898 41.375,138.125 44.315,138.125 44.45,138.26 44.45,141.925 43.797,142.578 U20.12@42.685,142.578
  Bottom Layer w0.254: P22.12@41.148,131.965 42.418,130.695 45.212,130.695 46.228,131.711 P22.8@46.228,131.965 47.498,130.695 50.419,130.695 51.308,131.584 P22.4@51.308,131.965
NetP22_5: P22.5 U1.17 | length 14.7
  Top Layer w0.254: P22.5@48.768,129.425 48.612,129.269 48.612,121.479 52.045,118.046 U1.17@53.911,118.046
NetP22_7: P22.7 U1.18 | length 16.2
  Top Layer w0.254: P22.7@46.228,129.425 46.228,129.095 48.158,127.165 48.158,121.291 51.903,117.546 U1.18@53.911,117.546
NetP22_9: P22.9 U1.22 | length 18.9
  Top Layer w0.254: P22.9@43.688,129.425 43.705,129.425 47.25,125.88 47.25,120.8 52.504,115.546 U1.22@53.911,115.546
NetP22_11: P22.11 U1.21 | length 23.2
  Top Layer w0.254: P22.11@41.148,129.425 41.525,129.425 42.9,130.8 44.375,130.8 45,130.175 45,128.975 47.704,126.271 47.704,121.021 52.679,116.046 U1.21@53.911,116.046
NetR1_2: R1.2 U1.41 | length 21.2
  Top Layer w0.254: U1.41@53.911,106.046 56.737,106.046 56.75,106.033 v1(56.75,105.775) ; v1(56.375,93.9) 56.328,93.947 56.328,93.973 56.455,94.1 59.114,94.1 R1.2@59.502,94.488
  Bottom Layer w0.254: v1(56.375,93.9) 56.04,93.9 54.048,95.892 54.048,97.237 57.301,100.49 57.301,101.499 56.981,101.819 56.981,105.544 v1(56.75,105.775)
NetR2_1: R2.1 S1.2 U1.48 | length 22.7
  Top Layer w0.254: U1.48@53.911,102.546 52.686,102.546 52.384,102.244 52.384,96.016 54.175,94.225 R2.1@54.175,92.275 ; R2.1@54.383,92.275 54.383,86.667 54.729,86.321 54.729,82.168 S1.2@54.791,82.106
NetR12_1: R12.1 R13.1 U1.67 | length 14.8
  Top Layer w0.254: U1.67@63.211,98.246 63.234,98.223 63.234,96.998 63.45,96.782 v1@63.45,95.9
  Bottom Layer w0.254: v1@57.1,88.269 60.644,88.269 63.525,91.15 v1(63.525,95.9)
  other v1: 57.05,88.125 61.402,88.9
NetR15_2: R15.2 S2.1 U1.36 U11.3 | length 57.5
  Top Layer w0.254: v1(53.267,96.283) 53.508,96.283 53.753,96.528 R15.2@53.848,96.528 ; U1.36@53.888,108.523 U1.36@53.911,108.546 v1(55.695,108.546) 56.449,109.3 v1(57.675,109.3) ; v1(59.184,132.191) 59.184,138.184 60.319,139.319 U11.3@61.312,139.319
  Bottom Layer w0.254: v1@55.625,108.55 55.625,105.633 56.527,104.731 56.527,101.502 56.75,101.279 56.75,100.581 53.325,97.156 53.325,95.922 56.597,92.65 v1(57.6,92.65) ; v1(57.675,109.3) 57.776,109.401 57.776,124.624 57.773,124.627 57.773,125.701 59.7,127.628 59.7,131.68 59.187,132.193 59.185,132.193 v1(59.184,132.191)
NetR16_2: R16.2 U1.42 | length 26.9
  Top Layer w0.254: R16.2@44.838,123.887 44.579,123.628 42.827,123.628 42.237,123.038 42.237,121.738 43.132,120.843 44.532,120.843 51.93,113.445 51.93,106.145 52.525,105.55 53.907,105.55 U1.42@53.911,105.546
NetR18_2: R18.2 R19.2 U1.103 U7.19 U8.19 | length 71.7
  Top Layer w0.254: U1.103@81.211,98.246 81.206,98.241 81.206,93.828 87.158,87.876 U8.19@90.496,87.876 v1@92.15,87.876 ; R19.2@89.85,121.92 90.295,121.475 91.4,121.475 93.035,119.84 93.904,119.84 U7.19@94.102,119.642 94.764,119.642 95.997,120.875 97.05,120.875 v1@97.237,120.688 ; v1(92.15,88.075) v1@92.15,87.876 ; R18.2@93.85,79.35 93.877,79.377 93.877,87.126 93.127,87.876 v1@92.15,87.876
  Bottom Layer w0.254: v1(92.15,88.075) 92.45,88.075 96.441,92.066 96.441,112.663 96.437,112.667 96.437,119.134 97.3,119.997 v1@97.3,120.675
  other v1: 97.225,120.675
NetR21_1: R21.1 U1.56 U10.7 | length 87.9
  Top Layer w0.254: U1.56@57.711,98.246 57.711,99.686 58.578,100.553 v1(58.578,100.907) ; R21.1@105.775,137.35 105.775,140.115 107.018,141.358 107.93,141.358 U10.7@107.953,141.381
  Bottom Layer w0.254: v1(58.578,100.907) 58.673,100.812 61.11,100.812 61.373,101.075 62.375,101.075 64.306,99.144 72.279,99.144 73.822,100.687 79.312,100.687 79.671,101.046 79.671,101.088 81.071,102.488 81.071,117.858 85.529,122.316 85.529,127.754 90.144,132.369 90.144,136.191 93.124,139.171 96.332,139.171 97.298,138.205 97.298,138.199 98.11,137.387 105.175,137.387 105.196,137.408 v1(105.275,137.375)
NetR22_2: R22.2 U10.19 | length 12.1
  Top Layer w0.254: U10.19@107.953,147.381 107.972,147.4 109.275,147.4 109.275,137.25 R22.2@108.646,137.25
NetR80_1: R80.1 U50.2 | length 16.2
  Top Layer w0.254: U50.2@43.675,99.6 43.294,99.6 42.998,99.896 42.998,103.865 44.973,105.84 44.973,110.502 44.175,111.3 44.175,112.821 R80.1@45.146,113.792
NetR81_1: R81.1 U50.1 | length 12.2
  Top Layer w0.254: U50.1@43.675,100.1 43.473,100.302 43.473,103.698 45.427,105.652 45.427,110.971 R81.1@45.146,111.252
NetR82_1: R82.1 U50.4 | length 19.7
  Top Layer w0.254: v1@41.927,99.275 42.335,99.275 42.997,98.613 43.662,98.613 U50.4@43.675,98.6
  Bottom Layer w0.254: v1(41.927,99.28) 43.473,100.826 43.473,104.448 45.325,106.3 v1(45.325,115.5)
NetR83_1: R83.1 U50.3 | length 10.2
  Top Layer w0.254: U50.3@43.675,99.1 43.152,99.1 42.544,99.708 42.544,104.053 44.096,105.605 R83.1@44.096,107.837
NetR84_1: R84.1 U50.6 | length 16.8
  Top Layer w0.254: v1(41.727,96.03) 41.716,96.04 41.716,96.238 43.078,97.6 U50.6@43.675,97.6 43.1,97.6
  Bottom Layer w0.254: v1@41.711,96.014 45.502,92.223 45.502,84.727 v1(45.075,84.3)
NetR85_1: R85.1 U50.7 | length 7.1
  Top Layer w0.254: R85.1@39.349,92.29 39.793,92.29 42.581,95.078 42.581,96.461 43.22,97.1 U50.7@43.675,97.1
NetR86_1: R86.1 U50.8 | length 9.6
  Top Layer w0.254: U50.8@43.675,96.6 43.384,96.6 43.035,96.251 43.035,92.973 43.775,92.233 43.775,88.394 R86.1@44.244,87.925
NetR87_1: R87.1 U50.9 | length 5.4
  Top Layer w0.254: U50.9@43.712,96.064 43.712,93.613 45.625,91.7 R87.1@45.625,91.45
NetR100_1: R100.1 U50.35 | length 9.3
  Top Layer w0.254: v1(44.525,102.925) 44.927,102.523 44.927,100.802 U50.35@44.9,100.775
  Bottom Layer w0.254: v1(44.525,102.925) 44.525,103.2 47.207,105.882 49.847,105.882 v1(50.017,105.712)
NetR250_1: R250.1 U50.13 U50.17 U50.19 U50.21 | length 12.6
  Top Layer w0.254: v1(45.7,94.225) 45.7,94.4 45.9,94.6 U50.13@45.9,95.35 ; U50.17@47.925,95.375 47.925,94.775 48.015,94.685 49.4,94.685 ; U50.19@49.125,96.1 49.915,96.1 ; U50.21@49.125,97.1 49.775,97.1 49.94,96.935 ; R250.1@49.468,93.472 49.4,93.54 49.4,94.685 ; 49.648,94.952 49.648,94.934 ; 49.96,96.935 49.94,96.935 ; 49.4,94.685 49.648,94.934 ; 49.648,94.934 49.94,95.225 49.94,96.935
  Bottom Layer w0.254: v1(45.7,94.225) 46.352,93.573 v1@49.25,93.573
  other v1: 49.25,93.6
NetU1_49: U1.49
NetU1_50: U1.50 U50.30 | length 15.4
  Top Layer w0.254: U50.30@47.4,100.775 47.4,102.807 48.85,104.257 v1(48.85,104.425) ; U1.50@55.017,101.523 55.04,101.546 U1.50@53.911,101.546 v1@55.469,101.546 ; v1@55.446,101.523 v1@55.469,101.546 ; v1(55.728,101.805) v1@55.469,101.546
  Bottom Layer w0.254: v1(48.85,104.425) 48.834,104.409 48.834,104.4 51.429,101.805 v1(55.728,101.805)
NetU1_51: U1.51 U50.31 | length 15
  Top Layer w0.254: U50.31@46.9,100.775 46.889,100.786 46.889,103.194 47.466,103.771 v1(47.466,104.068) ; U1.51@53.911,101.046 55.546,101.046
  Bottom Layer w0.254: v1(47.466,104.068) 48.179,104.068 51.447,100.8 v1(55.925,100.8)
NetU1_80: U1.80 U7.21 U8.21 | length 70.6
  Top Layer w0.254: U1.80@69.711,98.246 69.711,96.992 68.497,95.778 68.497,93.732 69.661,92.569 81.181,92.569 87.474,86.276 U8.21@90.496,86.276 U8.21@90.938,86.276 ; U8.21@90.939,86.275 92.825,86.275 93.15,86.6 v1(93.15,86.825) ; U7.21@94.102,117.872 94.355,118.125 97.125,118.125 97.475,118.475 v1(97.65,118.475)
  Bottom Layer w0.254: v1(93.15,86.825) 93.15,87.405 97.349,91.604 97.349,113.039 97.345,113.043 97.345,118.408 97.412,118.475 v1(97.65,118.475) v1@97.675,118.475
NetU1_81: U1.81 U7.20 U8.20 | length 68.9
  Top Layer w0.254: U1.81@70.211,98.246 70.234,98.223 70.234,96.809 68.951,95.526 68.951,93.92 69.849,93.023 81.369,93.023 87.421,86.971 90.392,86.971 U8.20@90.496,87.076 ; U8.20@90.893,87.076 U8.20@90.496,87.076 ; v1(91.599,87.076) U8.20@90.496,87.076 ; U7.20@94.33,118.9 95.088,118.9 v1@96.332,120.143
  Bottom Layer w0.254: v1(91.599,87.076) 91.423,87.252 91.423,88.376 91.849,88.802 92.476,88.802 95.987,92.313 95.987,112.475 95.983,112.479 95.983,119.708 v1(96.375,120.1)
NetU1_98: U1.98 U7.15 | length 35.1
  Top Layer w0.254: U1.98@78.711,98.246 78.734,98.269 78.734,99.507 78.881,99.654 78.881,99.706 79.3,100.125 79.825,100.125 v1(80.125,100.425) ; v1(91.35,123.8) 91.35,123.775 91.775,123.35 92.925,123.35 93.433,122.842 U7.15@94.102,122.842 ; U7.15@93.725,122.672 U7.15@94.102,122.672
  Bottom Layer w0.254: v1(80.125,100.425) 80.125,100.9 81.723,102.498 82.376,102.498 90.523,110.645 90.523,123.051 91.272,123.8 v1(91.35,123.8)
NetU1_99: U1.99 U8.15 | length 30.3
  Top Layer w0.254: U1.99@79.211,98.246 79.211,95.264 79.65,94.825 v1(79.65,94.7) ; U8.15@90.496,91.076 91.424,91.076 94.5,88 v1(94.5,87.625)
  Bottom Layer w0.254: v1(79.65,94.7) 79.65,93.933 88.835,84.748 92.071,84.748 93.421,86.098 93.451,86.098 94.5,87.147 v1(94.5,87.625)
NetU1_100: U1.100 U7.22 U8.22 | length 64
  Top Layer w0.254: U1.100@79.711,98.246 79.711,96.053 v1@80.325,95.439 ; U8.22@90.447,85.525 U8.22@90.496,85.476 ; U8.22@90.496,85.476 v1(91.675,85.475) ; U7.22@94.102,117.072 94.33,117.3 97.421,117.3 97.854,117.733 97.936,117.733 98.377,118.174 98.377,119.273 v1(98.175,119.475)
  Bottom Layer w0.254: v1(80.36,95.405) 80.275,95.32 80.275,95.275 80.525,95.025 80.525,93.7 88.75,85.475 v1(91.675,85.475) 92.423,86.223 92.423,87.32 96.895,91.792 96.895,112.851 96.891,112.855 96.891,118.919 97.472,119.5 v1@98.175,119.5
NetU1_101: U1.101 U7.39 | length 44.7
  Top Layer w0.254: U1.101@80.188,98.223 U1.101@80.211,98.246 80.211,99.471 81.09,100.35 81.09,100.39 81.15,100.45 v1(81.15,100.775) ; v1(90.7,109.375) 90.925,109.15 91.881,109.15 92.552,108.479 101.171,108.479 101.35,108.3 101.35,108.2 v1(101.3,108.15) ; U7.39@105.302,122.042 106.267,122.042 106.29,122.065 106.29,122.246 v1(106.28,122.256) ; U7.39@105.776,121.97 U7.39@105.802,121.97
  Bottom Layer w0.254: v1(81.15,100.775) 81.75,100.775 90.35,109.375 v1(90.7,109.375) ; v1@101.375,108.175 101.375,116.625 106.28,121.53 v1(106.28,122.256)
NetU1_102: U1.102 U8.39 | length 26.6
  Top Layer w0.254: v1(80.479,96.405) 80.711,96.637 U1.102@80.711,98.246 ; v1(94.725,93.95) 98.577,90.098 101.052,90.098 101.244,90.29 U8.39@101.335,90.29
  Bottom Layer w0.254: v1(80.479,96.405) 80.845,96.405 84.493,92.757 93.628,92.757 94.75,93.878 94.75,93.925 v1(94.725,93.95)
NetU1_104: U1.104 U7.17 U8.17 | length 56.8
  Top Layer w0.254: 81.688,95.442 81.688,95.65 ; U1.104@81.711,98.246 81.688,98.223 81.688,95.65 ; v1(88.35,88.7) 88.275,88.775 86.901,88.775 81.688,93.988 81.688,95.65 ; U8.17@90.873,89.476 U8.17@90.496,89.476 90.505,89.467 91.567,89.467 v1(91.629,89.529) ; U7.17@94.102,121.072 94.33,121.3 95.675,121.3 96.2,121.825 96.875,121.825 v1(96.925,121.775)
  Bottom Layer w0.254: v1@88.375,88.675 89.112,89.412 v1@91.625,89.412 ; v1@91.629,89.476 91.701,89.547 92.579,89.547 95.533,92.501 95.533,112.287 95.529,112.291 95.529,120.732 96.522,121.725 v1@96.925,121.725
NetU1_105: U1.105 U7.18 U8.18 | length 46.5
  Top Layer w0.254: U1.105@84.011,100.546 83.877,100.412 83.877,92.441 86.772,89.546 88.954,89.546 89.824,88.676 U8.18@90.496,88.676 ; v1@91.3,122.75 91.3,122.357 93.187,120.47 U7.18@93.904,120.47
  Bottom Layer w0.254: v1@84.004,100.1 84.892,100.1 91.562,106.77 91.562,122.438 v1(91.25,122.75)
  other v1: 83.951,100.05
NetU1_115: U1.115 U7.38 U8.38 | length 67.4
  Top Layer w0.254: U1.115@84.011,105.546 86.278,105.546 86.898,104.926 86.898,104.921 88.938,102.88 90.02,102.88 90.24,103.1 93.6,103.1 v1(94.3,102.4) ; v1(94.305,95.58) 94.3,95.575 94.2,95.575 93.975,95.35 93.975,93.672 98.273,89.373 101.594,89.373 U8.38@101.696,89.476 v1(102.726,89.476) ; U7.38@105.315,121.059 105.683,121.427 107.059,121.427 107.114,121.372 107.114,121.364 v1(107.075,121.325)
  Bottom Layer w0.254: v1(94.3,102.4) 94.023,102.123 94.023,95.802 94.25,95.575 94.255,95.58 v1(94.305,95.58) ; v1(102.726,89.476) 103.047,89.797 103.047,116.145 107.277,120.375 107.277,121.123 v1(107.075,121.325)
NetU1_116: U1.116 U7.16 U8.16 | length 52.3
  Top Layer w0.254: U1.116@84.011,106.046 86.479,106.046 88.9,103.625 v1(89.45,103.625) ; v1(84.975,93.575) 84.975,92.05 86.749,90.276 U8.16@90.496,90.276 ; v1@92.305,122.659 v1(92.343,122.62) 92.894,122.07 93.904,122.07 U7.16@94.102,121.872
  Bottom Layer w0.254: v1@85.05,93.65 82.223,96.477 82.223,98.651 82.872,99.3 85.35,99.3 92.016,105.966 92.016,122.541 92.095,122.62 v1(92.343,122.62)
NetU1_117: U1.117 U7.37 U8.37 | length 66.6
  Top Layer w0.254: U1.117@84.011,106.546 84.034,106.523 86.644,106.523 88.815,104.352 89.751,104.352 90.549,103.554 94.174,103.554 95.027,102.701 95.027,102.099 94.073,101.145 94.073,99.817 99.165,94.725 99.165,93.585 100.144,92.606 100.206,92.606 100.643,92.169 100.643,91.043 100.475,90.875 v1(100.275,90.875) ; v1(100.3,88.6) 100.325,88.575 101.596,88.575 U8.37@101.696,88.676 U8.37@101.688,88.667 ; U7.37@105.679,120.451 v1(106.325,120.451)
  Bottom Layer w0.254: v1@100.275,88.625 v1(100.275,90.875) ; v1(100.3,88.6) 102.593,90.893 102.593,116.719 v1(106.325,120.451)
NTRST: U1.35
USB5V: C33.1 J2.1 P25.1 R12.2 | length 19
  Bottom Layer w0.5: J2.1@53.604,82.451 53.604,84.654
  Bottom Layer w0.8: 53.75,84.625 57.3,84.625 59.725,87.05 63.8,87.05 65.561,85.289 P25.1@65.561,81.996
  other v1: 57.675,85.5 59.575,86.975
pads on no net: J2.5 J2.6 J2.7 J2.8 J2.9 J2.MH1 J2.MH2 J3.1 J3.4 J3.6 J3.7 J3.8 J3.9 J3.10 J3.11 J51.9 J51.10 J51.11 J51.12 J52.9 J52.10 J52.11 J52.12 J96.MH1 J96.MH2 J96.SW2 J96.SW3 U1.1 U1.2 U1.3 U1.4 U1.7 U1.8 U1.9 U1.10 U1.11 U1.12 U1.19 U1.20 U1.23 U1.26 U1.27 U1.28 U1.29 U1.30 U1.31 U1.34 U1.37 U1.43 U1.58 U1.60 U1.61 U1.62 U1.63 U1.64 U1.68 U1.69 U1.70 U1.75 U1.76 U1.79 U1.82 U1.85 U1.127 U1.152 U1.158 U1.159 U1.161 U1.162 U1.163 U1.164 U1.165 U1.166 U1.167 U1.168 U1.171 U1.172 U1.175 U1.176 U1.177 U1.178 U1.185 U1.186 U1.190 U1.191 U1.192 U1.193 U1.194 U1.195 U1.196 U1.197 U1.198 U1.201 U1.202 U1.205 U1.206 U1.207 U1.208 U7.40 U8.40 U10.1 U10.2 U10.3 U10.4 U10.5 U10.6 U10.10 U10.11 U10.14 U10.15 U10.20 U10.21 U10.22 U10.23 U10.24 U10.25 U10.26 U10.27 U10.28 U10.33 U10.34 U10.35 U10.39 U10.40 U10.45 U10.46 U10.47 U10.48 U11.5 U20.8 U20.9 U20.11 U20.14 U50.12 U50.16 U50.18 U50.20

## Keep-outs
Keep-Out Layer:
  lines w0.3: 34.425,150.625 110.025,150.625 110.025,75.1 34.55,75.1 34.55,150.625 34.425,150.625

## Other copper
Top Layer:
  text "ORCS" at 92.725,147.8 h1.52
  text "ORCS-OS" at 63.373,116.09 h1.52
Bottom Layer:
  text "ORCS" at 105.475,147.8 h1.52

## Silkscreen, mask and mechanical layers (free items; w line width, h text height)
Top Overlay:
  text "TX" at 49.35,130.35 h0.5
  text "ORCS-OS" at 63.5,116.09 h1.52
  text "www.orcs.sebsoft.com" at 108.95,87.025 h1 r90
  text "USB+" at 66.6,82.15 h0.8
  text "+" at 66.375,79.7 h1
  text "ORCS-OS Open Robotics Control System" at 55.875,75.7 h1.4
Bottom Overlay:
  text "ORCS-OS" at 73.675,113.6 h1.52
Drill Drawing:
  text ".LEGEND" at 118.5,95.55 h1.52
  text "Drill Drawing." at 118.4,68.25 h1.52

## Panel: embedded boards
"" at 123.6,109.7, 1 rows x 1 columns, spacing 63.5 x 38.1, rotation 0

## Text inside footprints (layer, text, board x,y; h text height)
C39: Top Overlay "+" at 76.925,134.675 h1 r180
C45: Top Overlay "+" at 64.77,84.074 h1 r90
C46: Top Overlay "+" at 74.819,89.218 h1 r180
C47: Top Overlay "+" at 81.026,79.121 h1 r270
C88: Top Overlay "+" at 74.126,144.699 h1.5 r270
C91: Top Overlay "+" at 40.622,123.546 h1.5 r90
C92: Top Overlay "+" at 59.009,130.314 h1.5
C93: Top Overlay "+" at 51.55,120.477 h1.5 r90
J3: Bottom Overlay "1" at 42.315,141.934 h1.5 r90; Bottom Overlay "5" at 42.315,131.104 h1.5 r90; Bottom Overlay "9" at 36.703,130.683 h1.5 r90; Bottom Overlay "6" at 36.703,142.621 h1.5 r90
J51: Mechanical 1 "PCB Edge" at 26.616,105.503 h0.2 r270
J52: Mechanical 1 "PCB Edge" at 26.716,77.39 h0.2 r270
P22: Bottom Overlay "12" at 39.497,129.425 h1.27; Bottom Overlay "1" at 38.608,127.52 h1.27; Bottom Overlay "1" at 39.497,127.52 h1.27; Bottom Overlay "1" at 55.686,128.79 h1.27; Bottom Overlay "2" at 56.388,131.457 h1.27